# Altium PCB 虚拟离子电流.PCBDOC
Units mm, origin at the board's own origin, x right, y up, seen from the top; angles counter-clockwise.
Board outline 152.4 x 101.6 mm, 2 copper layers (Top Layer, Bottom Layer); 6 components, 6 nets, 16 pads, 0 vias.
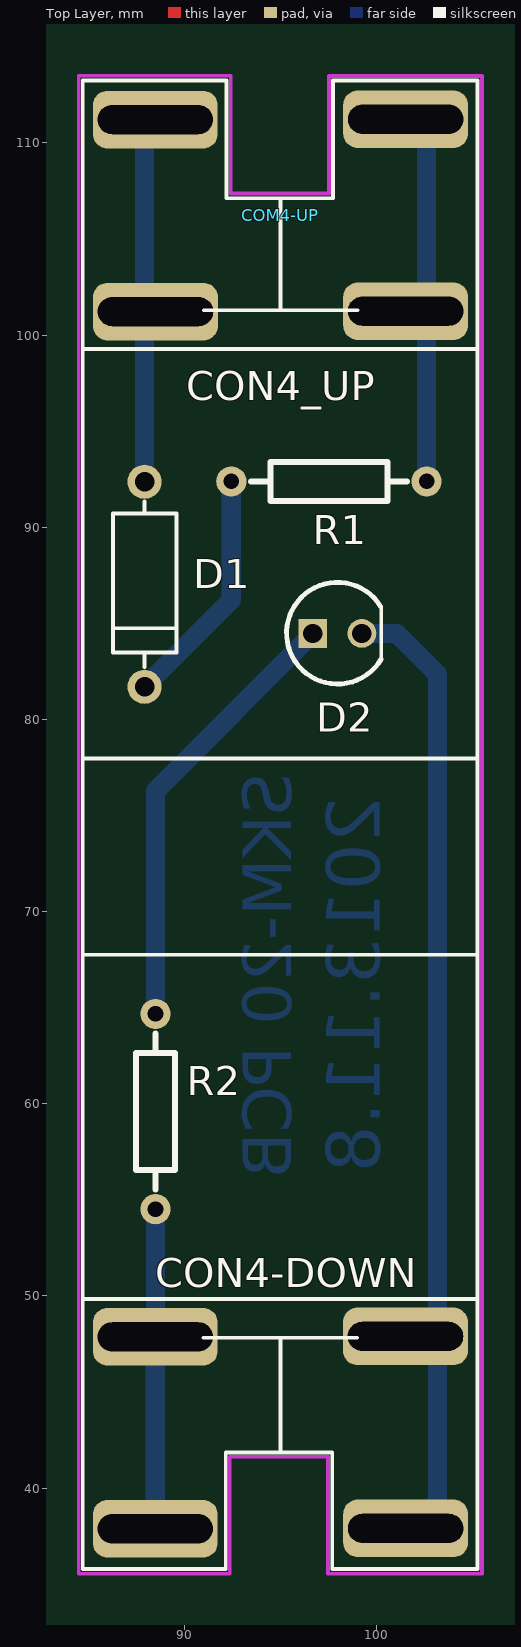
[diagram p0: Top Layer view]
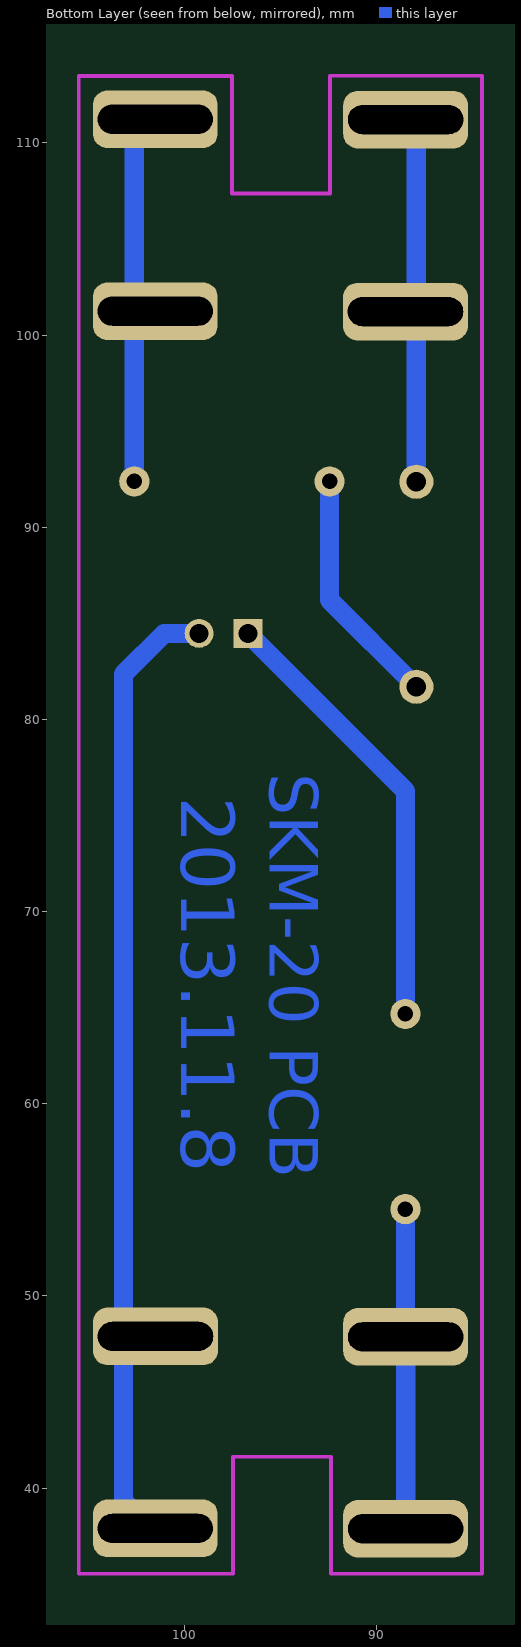
[diagram p1: Bottom Layer view, seen from below]

## Layer stack, top to bottom
Top Layer: signal copper 0.0356
Dielectric: core 0.32, FR-4, Dk 4.8
Bottom Layer: signal copper 0.0356

## Board outline
25.4,25.4 177.8,25.4 177.8,127 25.4,127

## Design rules (kind name [scope] priority, off if disabled: settings)
Clearance [All] p1: gap=0.254
ComponentClearance [All] p1: gap=0.254 collisioncheckmode=3 verticalgap=0.254
PolygonConnect [All] p1: connectstyle=Relief reliefconductorwidth=0.254 reliefentries=4 polygonreliefangle="90 Angle"
RoutingVias [All] p1: holewidth=0.711 width=1.27 viastyle="Through Hole" minholewidth=0.711 minwidth=1.27 maxholewidth=0.711 maxwidth=1.27
SolderMaskExpansion [All] p1: expansion=0.102
TestPointUsage [All] p1: valid=0 allowmultiple=FALSE
Testpoint [All] p1: side=15 testpointundercomponent=TRUE minsize=1.016 maxsize=2.54 preferedsize=1.524 minholesize=0 maxholesize=1.016 preferedholesize=0.813 testpointgrid=0.025 style=1023 order=0123456789
Width [All] p1: maxlimit=2 minlimit=0.254 preferedwidth=1
18 further rules are at their usual default settings.

## Components (designator, comment, footprint, x,y, rotation, side; value= is the part's Value field where it differs from the comment)
COM4-UP "CON4_UP" CON4_UP 94.99,111.26 r180 top
CON4-DOWN "CON4-DOWN" CON4_DOWN 94.97,47.83 r0 top
D1 "IN4007" D 87.9,87.2 r270 top
D2 "LED" LED 97.94,84.473 r0 top
R1 "2.2M" R 97.5,92.3 r180 top
R2 "4.7K" R 88.4,59.6 r90 top

## Footprints (in the part's own frame and the unit in brackets; to place one, negate y for a bottom-side part, rotate by r counter-clockwise, add the part's x,y. Pads: shape width x height; smd on the part's side, far side on the other; paste and mask are expansions set on the pad)
CON4_DOWN [mm]
  rrect50% 6.5x3 hole 1.5 slot 6 at 0 deg: 5(-6.5,0.04) 6(6.52,0.06) 7(-6.5,-9.95) 8(6.53,-9.93)
  silkscreen extent -10.27,-12.05 10.27,2
CON4_UP [mm]
  rrect50% 6.5x3 hole 1.5 slot 6 at 0 deg: 1(-6.51,10.02) 2(6.51,10.04) 3(-6.51,0.03) 4(6.52,0.05)
  silkscreen extent -10.24,-1.99 10.29,11.99
D [mil]
  round 70 hole 40: 1(-203.24,0.54) 2(216.76,0.54)
  silkscreen extent -163,-64 177,66
LED [mm]
  rect 1.5x1.5 hole 1: A(-1.27,-0.01)
  round 1.5 hole 1: K(1.28,0)
  silkscreen extent -2.63,-2.64 2.29,2.65
R [mil]
  round 62 hole 32: 1(-200.35,-3.31) 2(199.65,-3.31)
  silkscreen extent -160,-43 160,37

## Part data
D1 D2: library part D
R1 R2: library part R

## Nets (pads, with @x,y where several pads share a name; then routed paths per layer and width w, separated by ;. In a path a pad name is that pad's centre, name@x,y a point inside that pad or via, vN(x,y) a via of type N, cw(c..) or ccw(c..) an arc to the next point about the centre after c; other vN are vias at no path point)
NetCOM4-UP_1: COM4-UP.1 COM4-UP.3 R1.1 | length 18.6
  Bottom Layer w1: R1.1 COM4-UP.3@102.589,110.979
NetCOM4-UP_2: COM4-UP.2 COM4-UP.4 D1.1 | length 19.5
  Bottom Layer w1: D1.1 COM4-UP.4@87.914,111.88 ; COM4-UP.4 COM4-UP.4@88.48,111.21
NetCON4-DOWN_5: CON4-DOWN.5 CON4-DOWN.7 R2.1 | length 16.6
  Bottom Layer w1: CON4-DOWN.7 CON4-DOWN.5 88.484,47.884 R2.1
NetCON4-DOWN_6: CON4-DOWN.6 CON4-DOWN.8 D2.K | length 50.2
  Bottom Layer w1: D2.K 101.037,84.473 103.15,82.36 103.15,39.31 CON4-DOWN.8@101.53,37.69 ; CON4-DOWN.6 CON4-DOWN.6@101.5,47.9
NetD1_2: D1.2 R1.2 | length 12.6
  Bottom Layer w1: D1.2 92.429,86.21 R1.2
NetD2_A: D2.A R2.2 | length 23.2
  Bottom Layer w1: R2.2 88.484,76.277 D2.A

## Keep-outs
Keep-Out Layer:
  lines w0.2: 92.4,107.36 97.51,107.36 97.51,113.48 105.48,113.48 105.48,35.54 97.46,35.54 97.46,41.61 ; 92.4,107.38 92.4,113.49 84.49,113.49 84.49,35.54 92.35,35.54 92.35,41.63 97.46,41.63

## Other copper
Bottom Layer:
  text "SKM-20 PCB" at 95.55,77.19 h2.52 r90
  text "2013.11.8" at 100.15,75.98 h2.8 r90

## Silkscreen, mask and mechanical layers (free items; w line width, h text height)
Top Overlay:
  lines w0.2: 84.7,35.78 84.7,49.83 84.7,99.24 ; 84.7,67.75 105.24,67.75 ; 84.7,77.96 105.24,77.96 ; 84.7,113.25 92.071,113.25 92.18,113.25 92.18,107.12 97.718,107.12 97.718,113.25 105.23,113.25 ; 84.73,35.78 92.09,35.78 ; 92.14,35.78 92.14,41.85 97.68,41.85 97.68,35.78 105.24,35.78 ; 105.24,49.84 105.24,99.27
Bottom Solder:
  text "SKM-20 PCB" at 95.55,77.19 h2.52 r90
  text "2013.11.8" at 100.15,75.98 h2.8 r90